# EAGLE board satshakit-grbl (EAGLE 8.4.3)
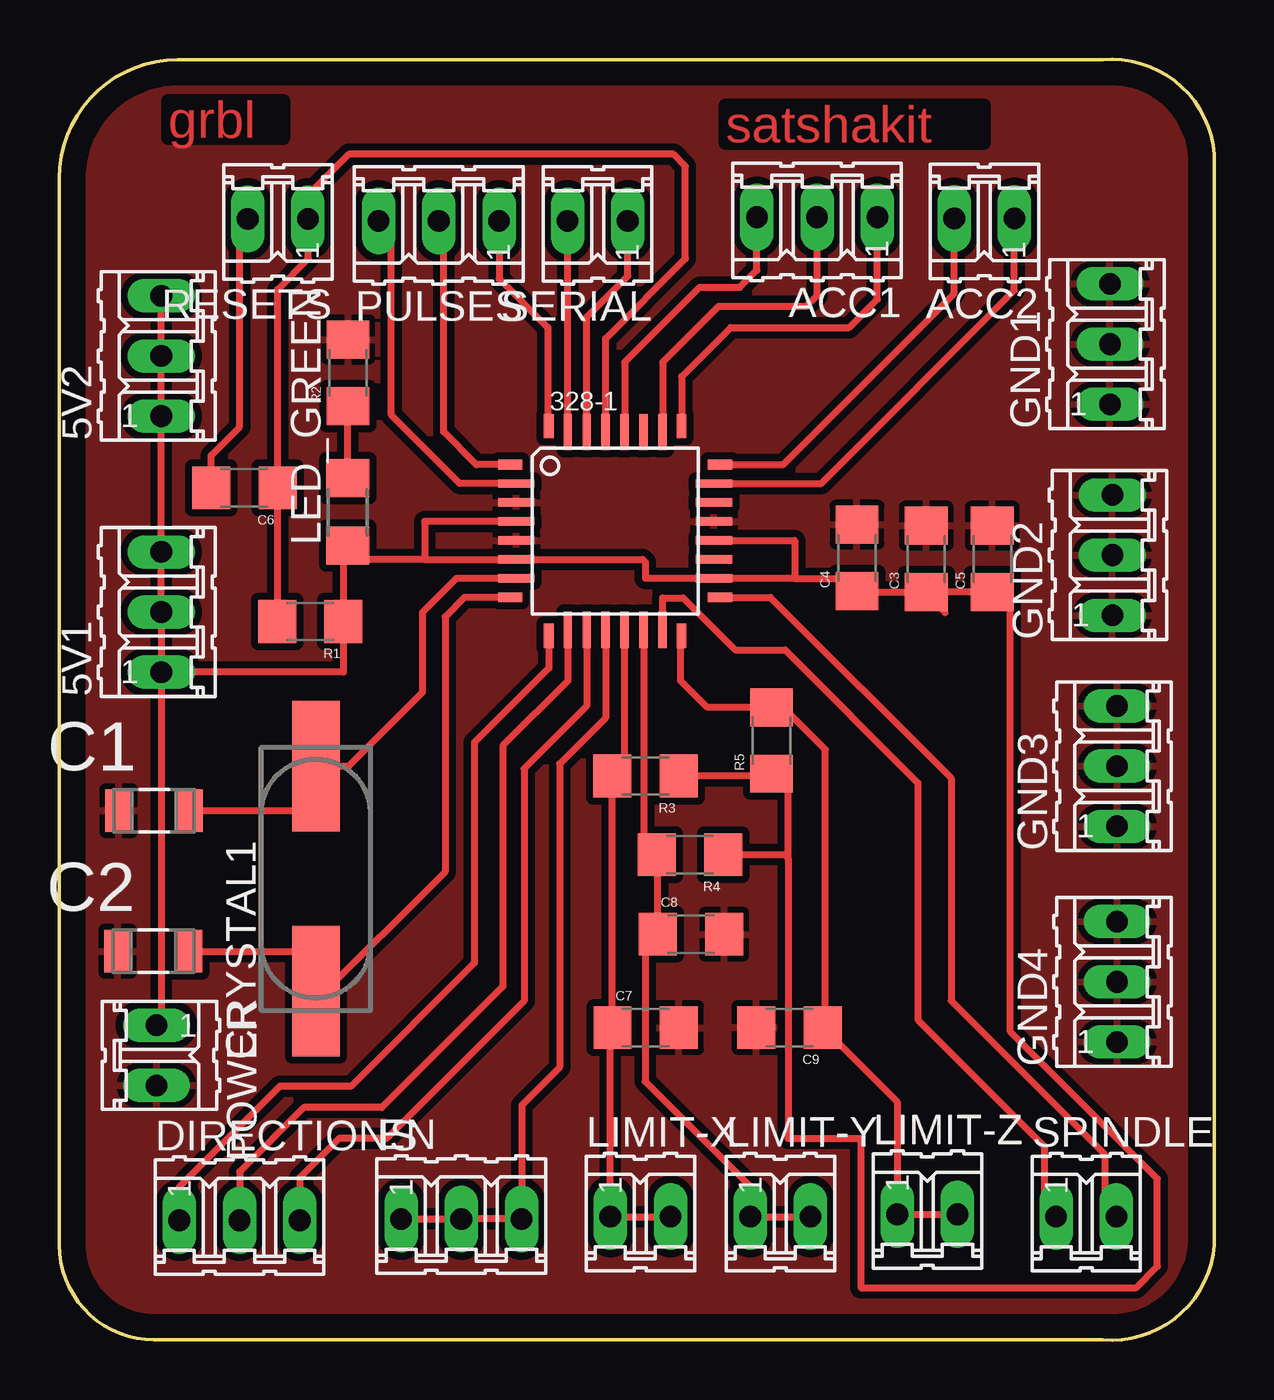
[diagram p0: board, top side]

Size 48.7 x 54.03 mm. Coordinates in mm from the lower left corner, seen from the top.
Outline: 4,0.01 44,0.01 arc90 48.7,4.01 48.7,50.01 arc90 44,54.01 5,54.01 arc90 0,49.01 0,4.01 arc90 4,0.01
Copper layers (1*16): Top 0.035mm / dielectric 1.5mm / Bottom 0.035mm
Design rules "default": minimum track width 10mil, minimum drill 24mil, track to track 8mil, track to pad 8mil, pad to pad 8mil, via to via 8mil, smd to smd 8mil, copper to edge 40mil, drill to drill 8mil, minimum pad ring 10mil, minimum via ring 8mil, stop-mask expansion 4mil, vias tented up to drill 0mil, thermal gap 10mil
tKeepout: 8 lines
bKeepout: 8 lines

## Footprints (pad centres in the part's own frame; a part is rotated, then mirrored left to right if it is on the bottom)
03P = drill 0.914 long: 1 -2.54,0; 2 0,0; 3 2.54,0
TQFP32-08 = smd 1.016 x 0.406: 1 -4.42,2.8; 8 -4.42,-2.8; 17 4.42,-2.8; 24 4.42,2.8 | smd 1.524 x 0.356: 2 -4.166,2; 3 -4.166,1.2; 4 -4.166,0.4; 5 -4.166,-0.4; 6 -4.166,-1.2; 7 -4.166,-2; 18 4.166,-2; 19 4.166,-1.2; 20 4.166,-0.4; 21 4.166,0.4; 22 4.166,1.2; 23 4.166,2 | smd 0.406 x 1.016: 9 -2.8,-4.42; 16 2.8,-4.42; 25 2.8,4.42; 32 -2.8,4.42 | smd 0.356 x 1.524: 10 -2,-4.166; 11 -1.2,-4.166; 12 -0.4,-4.166; 13 0.4,-4.166; 14 1.2,-4.166; 15 2,-4.166; 26 2,4.166; 27 1.2,4.166; 28 0.4,4.166; 29 -0.4,4.166; 30 -1.2,4.166; 31 -2,4.166
02P = drill 0.914 long: 1 -1.27,0; 2 1.27,0
CAPC3216X178N = smd 1.118 x 1.803: 1 -1.499,0; 2 1.499,0
1206 = smd 1.6 x 1.8: 1 -1.4,0; 2 1.4,0
CSM-7X-DU = smd 5.5 x 2: 1 -4.75,0; 2 4.75,0
1206' = smd 1.6 x 1.803: 1 -1.422,0; 2 1.422,0

## Placement (x,y rotation side)
5V1  [03P]  4.3,30.71 90 top
5V2  [03P]  4.3,41.51 90 top
328-1  ATMEGA328P-AU  [TQFP32-08]  23.44,34.13 0 top
ACC1  [03P]  31.95,47.36 180 top
ACC2  [02P]  39,47.31 180 top
C1  18pF  [CAPC3216X178N]  4,22.34 0 top
C2  18pF  [CAPC3216X178N]  3.96,16.41 0 top
C3  10uF  [1206]  36.56,32.95 90 top
C4  1uF  [1206]  33.63,33 90 top
C5  100nF  [1206]  39.34,32.95 90 top
C6  100nF  [1206]  7.8,35.95 180 top
C7  100nF  [1206]  24.72,13.18 0 top
C8  100nF  [1206]  26.63,17.13 0 top
C9  100nF  [1206]  30.79,13.19 180 top
CRYSTAL1  16Mhz  [CSM-7X-DU]  10.82,19.47 90 top
DIRECTIONS  [03P]  7.6,5.06 0 top
EN  [03P]  16.95,5.11 0 top
GND1  [03P]  44.3,42.01 90 top
GND2  [03P]  44.4,33.11 90 top
GND3  [03P]  44.6,24.21 90 top
GND4  [03P]  44.6,15.11 90 top
LED_GREEN  [1206']  12.16,34.93 90 top
LIMIT-X  [02P]  24.5,5.21 0 top
LIMIT-Y  [02P]  30.4,5.21 0 top
LIMIT-Z  [02P]  36.6,5.31 0 top
POWER  [02P]  4.1,12.01 270 top
PULSES  [03P]  16,47.21 180 top
R1  10k  [1206]  10.58,30.32 180 top
R2  499  [1206]  12.18,40.8 90 top
R3  4.7K  [1206]  24.71,23.8 180 top
R4  4.7K  [1206]  26.59,20.48 180 top
R5  4.7K  [1206]  30.03,25.29 90 top
RESETS  [02P]  9.21,47.29 180 top
SERIAL  [02P]  22.7,47.21 180 top
SPINDLE  [02P]  43.3,5.21 0 top

## Library data of the parts
5V1 5V2 ACC1 ACC2 DIRECTIONS EN GND1-GND4 LIMIT-X LIMIT-Y LIMIT-Z POWER PULSES RESETS SERIAL SPINDLE = con-amp-quick; OC_FARNELL: unknown; OC_NEWARK: unknown
328-1 = atmega8
C1 C2 = AVX_By_element14_Batch_1; MPN: 0612ZC225MAT2A; OC_FARNELL: -; OC_NEWARK: 12N3209; SUPPLIER: AVX; TOLERANCE: ±20%; VOLTAGERATING: 10V
C3-C9 R1-R5 = 01_SparkFun
CRYSTAL1 = 01_FAB_Hello; OC_FARNELL: unknown; OC_NEWARK: unknown
LED_GREEN = 01_FAB_Hello

## Nets
5V: 5V1.1 5V1.2 5V1.3 5V2.1 5V2.2 5V2.3 328-1.4 328-1.6 328-1.18 328-1.20 C3.1 C4.1 C5.1 LED_GREEN.1 POWER.1 R1.1 R3.1 R4.1 R5.1
ABORT: 328-1.23 ACC2.1
COOLANT: 328-1.26 ACC1.2
DIRECTION-X: 328-1.9 DIRECTIONS.1
DIRECTION-Y: 328-1.10 DIRECTIONS.2
DIRECTION-Z: 328-1.11 DIRECTIONS.3
EN: 328-1.12 EN.1 EN.2 EN.3
FEEDHOLD: 328-1.24 ACC2.2
GND: 328-1.3 328-1.5 328-1.21 C1.1 C2.1 C3.2 C4.2 C5.2 C7.2 C8.2 C9.2 GND1.1 GND1.2 GND1.3 GND2.1 GND2.2 GND2.3 GND3.1 GND3.2 GND3.3 GND4.1 GND4.2 GND4.3 POWER.2 R2.2
LIMIT-X: 328-1.13 C7.1 LIMIT-X.1 LIMIT-X.2 R3.2
LIMIT-Y: 328-1.14 C8.1 LIMIT-Y.1 LIMIT-Y.2 R4.2
LIMIT-Z: 328-1.16 C9.1 LIMIT-Z.1 LIMIT-Z.2 R5.2
N$2: 328-1.7 C1.2 CRYSTAL1.2
N$9: 328-1.8 C2.2 CRYSTAL1.1
N$26: LED_GREEN.2 R2.1
PROBE: 328-1.28 ACC1.3
PULSE-X: 328-1.32 PULSES.1
PULSE-Y: 328-1.1 PULSES.2
PULSE-Z: 328-1.2 PULSES.3
RST: 328-1.29 C6.1 R1.2 RESETS.1
RST-FTDI: C6.2 RESETS.2
RX: 328-1.30 SERIAL.1
SPINDLE: 328-1.15 SPINDLE.1
SPINDLE-DIR: 328-1.17 SPINDLE.2
START-RESUME: 328-1.25 ACC1.1
TX: 328-1.31 SERIAL.2

## Tracks (layer width: path | path; a pad name or v marks a point on that pad's centre or on a via)
5V
  Top 0.254: 328-1.20 26.99,33.73 26.99,33.75
  Top 0.305: 328-1.18 | 328-1.20 | 27.6,32.1 328-1.18 | 328-1.20 26.99,33.75 | 19.96,32.94 328-1.6 | 328-1.18 24.71,32.13 24.71,32.81 24.59,32.93 328-1.6 | R3.1 29.83,23.8 R5.1 30.73,23.19 30.73,20.31 | R4.1 30.56,20.48 30.73,20.31 | 30.73,20.31 30.73,8.51 33.8,8.51 33.8,2.21 45.4,2.21 46.3,3.11 46.3,6.81 40.1,13.01 40.1,30.79 C5.1 C3.1 | 15.4,32.93 328-1.6 | 15.4,32.93 12.16,32.93 LED_GREEN.1 11.98,33.51 R1.1 11.98,28.17 5V1.1 | 35.81,31.6 C3.1 | 36.21,31.2 C3.1 | 328-1.4 15.4,34.53 15.4,32.93 | 36.47,31.57 36.31,31.6 | 36.47,31.57 C3.1 | 37.35,30.69 36.47,31.57 | C3.1 33.68,31.55 C4.1 33.1,32.13 31,32.13 | 31,32.13 328-1.18 | 5V1.1 5V1.2 5V1.3 5V2.1 5V2.2 5V2.3 | 328-1.20 31,33.73 31,32.13 | 5V1.1 4,28.17 | 5V1.1 4.3,13.48 POWER.1
ABORT
  Top 0.305: 328-1.23 32.12,36.13 40.27,44.28 ACC2.1
COOLANT
  Top 0.305: 328-1.26 25.44,41.25 27.8,43.61 31.5,43.61 31.95,44.07 ACC1.2
DIRECTION-X
  Top 0.305: 328-1.9 20.64,28.35 17.5,25.21 17.5,15.91 12.3,10.71 9.3,10.71 5.06,6.47 DIRECTIONS.1
DIRECTION-Y
  Top 0.305: 328-1.10 21.44,27.81 18.7,25.08 18.7,14.91 13.6,9.81 10.3,9.81 7.6,7.11 DIRECTIONS.2
DIRECTION-Z
  Top 0.305: 328-1.11 22.24,26.75 19.6,24.11 19.6,14.31 13.8,8.51 11.8,8.51 10.14,6.85 DIRECTIONS.3
EN
  Top 0.305: 23.06,29.97 328-1.12 23.04,26.25 21.1,24.31 21.1,11.51 19.5,9.91 19.5,5.21 19.4,5.11 | EN.1 EN.2 19.4,5.11 | 19.4,5.11 EN.3
FEEDHOLD
  Top 0.305: 328-1.24 30.52,36.93 37.73,44.14 ACC2.2
GND
  Top 0.305: 328-1.5 | 328-1.21
  pour Top (isolate 0.305): 0,4.01 0,49.01 arc-90 5,54.01 44,54.01 arc-90 48.7,50.01 48.7,4.01 arc-90 44,0.01 4,0.01 arc-90
LIMIT-X
  Top 0.305: 328-1.13 23.84,23.8 R3.2 23.32,23.79 23.32,13.31 | 23.32,13.21 23.32,13.31 | 23.32,13.21 C7.1 | 23.93,12.71 23.32,13.31 | 23.53,13.01 23.32,13.21 | LIMIT-X.2 LIMIT-X.1 23.23,13.12 23.32,13.21
LIMIT-Y
  Top 0.305: C8.1 25.23,20.44 R4.2 24.64,21.04 328-1.14 | 24.9,16.79 C8.1 | C8.1 24.7,16.59 24.7,10.91 29.13,6.48 LIMIT-Y.1 LIMIT-Y.2
LIMIT-Z
  Top 0.305: 328-1.16 26.2,29.67 26.2,27.81 27.32,26.69 R5.2 30.52,26.69 32.3,24.91 32.3,13.3 C9.1 35.33,10.05 LIMIT-Z.1 LIMIT-Z.2
N$2
  Top 0.305: 19.27,32.1 328-1.7 16.74,32.13 15.31,30.7 15.31,27.32 12.2,24.22 CRYSTAL1.2 | 10.82,22.34 CRYSTAL1.2 | C1.2 10.82,22.34 | 10.82,22.34 CRYSTAL1.2
N$9
  Top 0.305: 328-1.8 17.08,31.33 16.26,30.51 16.26,19.76 10.82,14.31 CRYSTAL1.1 | 10.82,16.41 CRYSTAL1.1 | C2.2 10.82,16.41 | 10.82,16.41 CRYSTAL1.1
N$26
  Top 0.305: LED_GREEN.2 12.16,39.4 R2.1
PROBE
  Top 0.305: 328-1.28 23.84,41.25 27,44.41 28.7,44.41 29.41,45.13 ACC1.3
PULSE-X
  Top 0.305: PULSES.1 18.54,44.77 20.6,42.71 20.6,38.59 328-1.32
PULSE-Y
  Top 0.305: 328-1.1 17.58,36.93 16.2,38.31 16.2,47.01 PULSES.2
PULSE-Z
  Top 0.305: 328-1.2 16.88,36.13 14,39.01 14,46.51 13.46,47.05 PULSES.3
RST
  Top 0.305: R1.2 9.2,30.34 C6.1 9.2,44.32 10.5,45.61 10.5,47.28 RESETS.1 10.48,48.3 12.2,50.01 25.9,50.01 26.4,49.51 26.4,45.61 23.04,42.25 328-1.29
RST-FTDI
  Top 0.305: C6.2 6.4,37.32 7.6,38.51 7.6,46.95 RESETS.2
RX
  Top 0.305: 328-1.30 22.24,43.15 23.97,44.88 SERIAL.1
SPINDLE
  Top 0.305: 328-1.15 25.44,31.31 26.3,31.31 28.5,29.11 30.6,29.11 36.2,23.51 36.2,13.51 41.53,8.18 41.53,5.71 SPINDLE.1
SPINDLE-DIR
  Top 0.305: 328-1.17 29.98,31.33 37.6,23.71 37.6,14.31 44.07,7.84 44.07,5.71 SPINDLE.2
START-RESUME
  Top 0.305: 328-1.25 26.24,40.65 28.3,42.71 33.3,42.71 34.49,43.9 ACC1.1
TX
  Top 0.305: SERIAL.2 328-1.31

## Text on the board
Top: grbl | satshakit